# Altium PCB ESP32C3-DevBoard.PcbDoc
Units mm, origin at the board's own origin, x right, y up, seen from the top; angles counter-clockwise.
Board outline 22.86 x 30.48 mm, 4 copper layers (Top Layer, Int1 (GND), Int2 (PWR), Bottom Layer), stack 1.575 mm thick; 41 components, 31 nets, 173 pads, 64 vias.
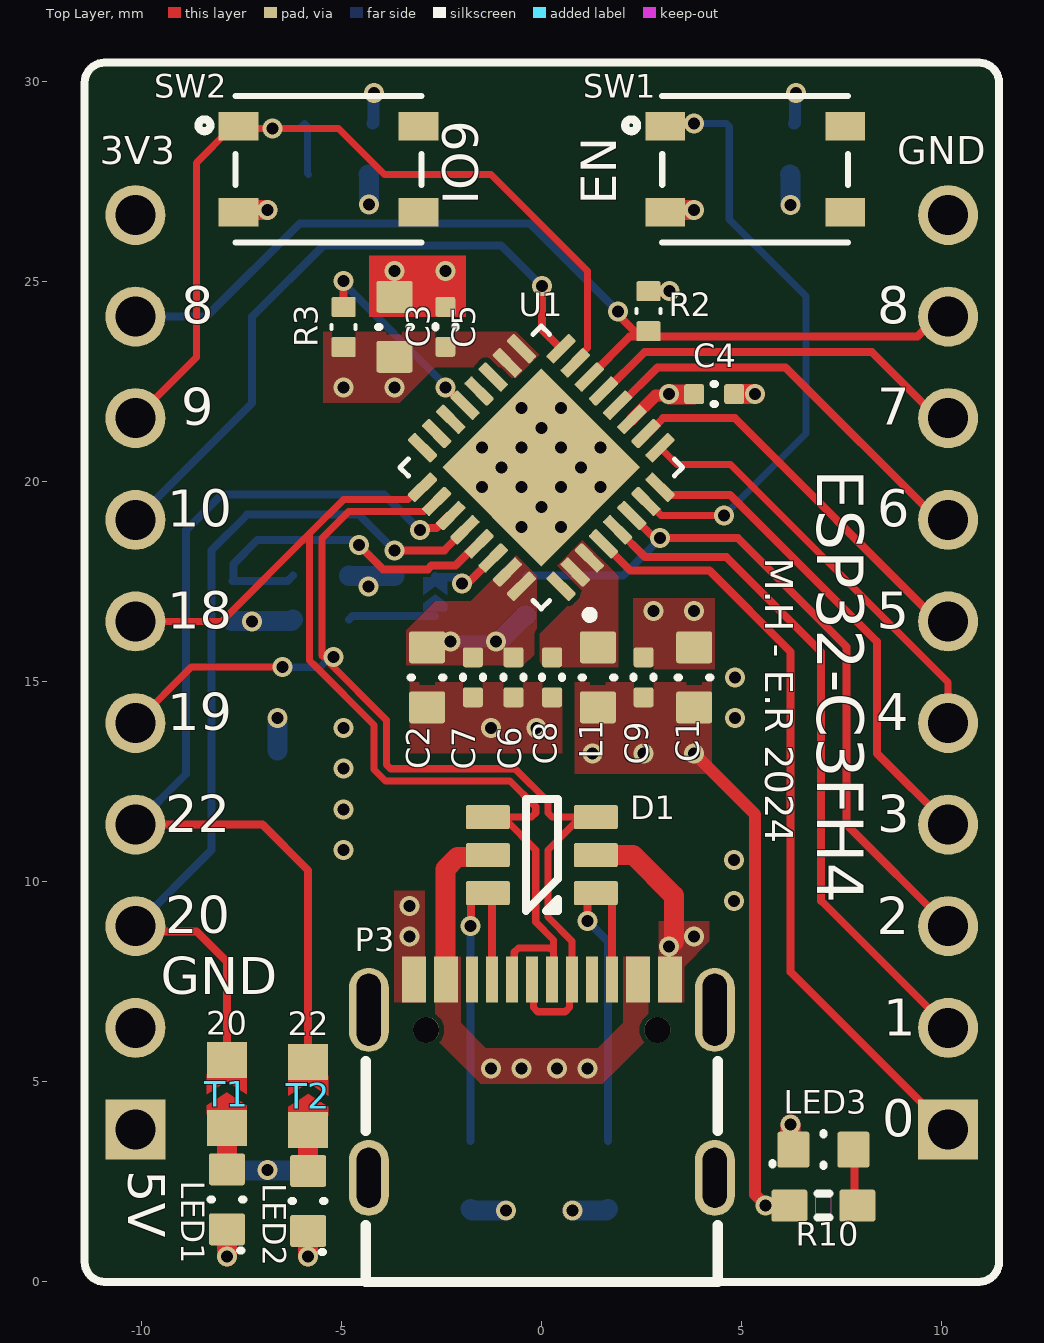
[diagram p0: Top Layer view]
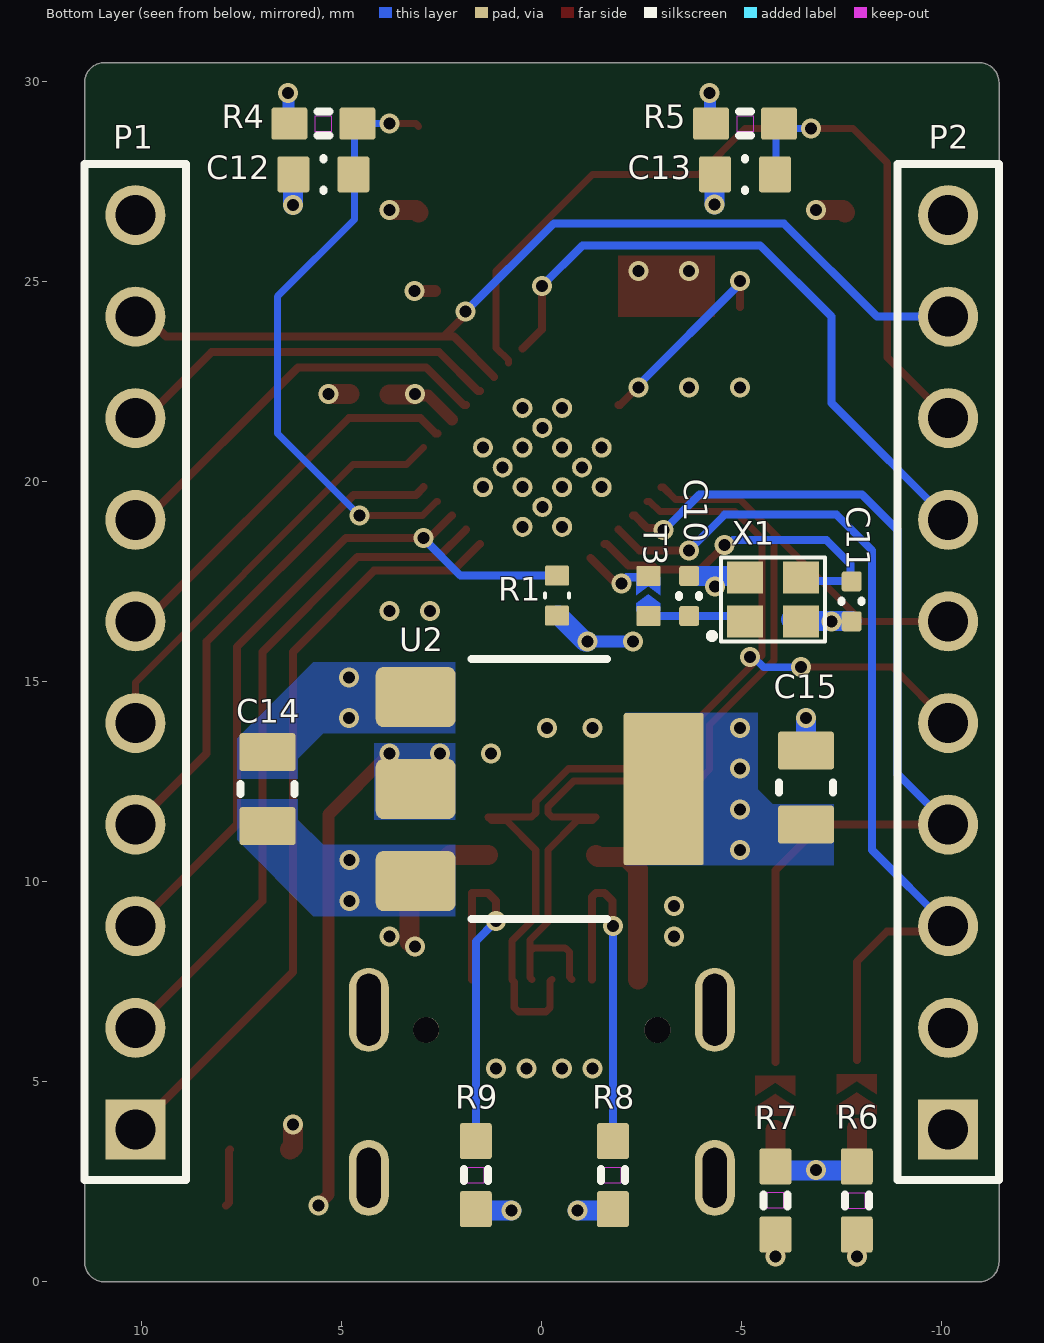
[diagram p1: Bottom Layer view, seen from below]
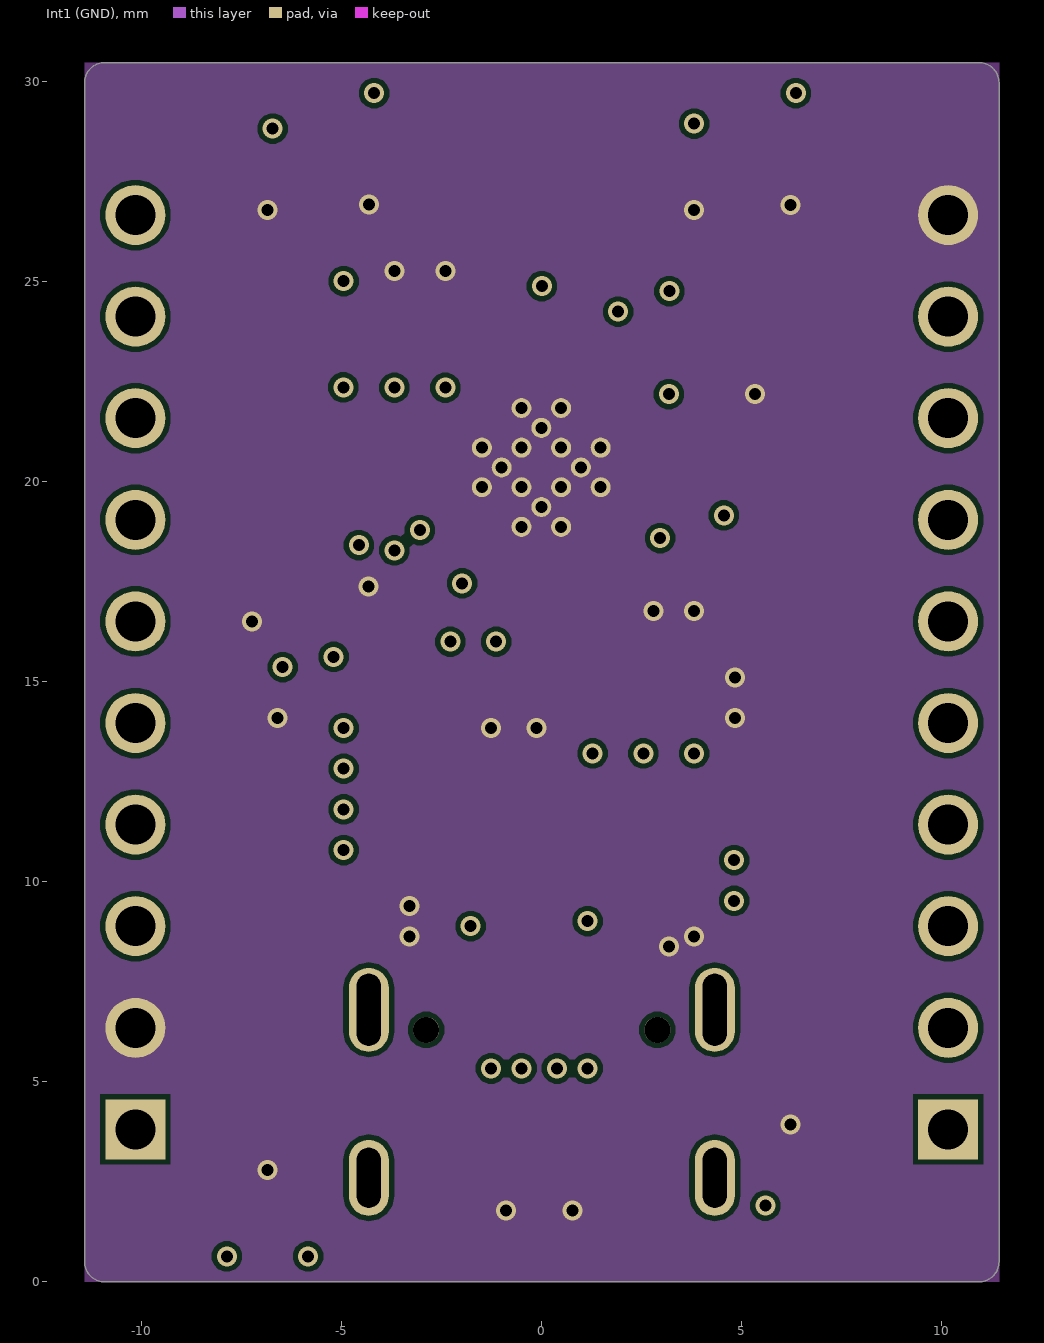
[diagram p2: Int1 (GND)]
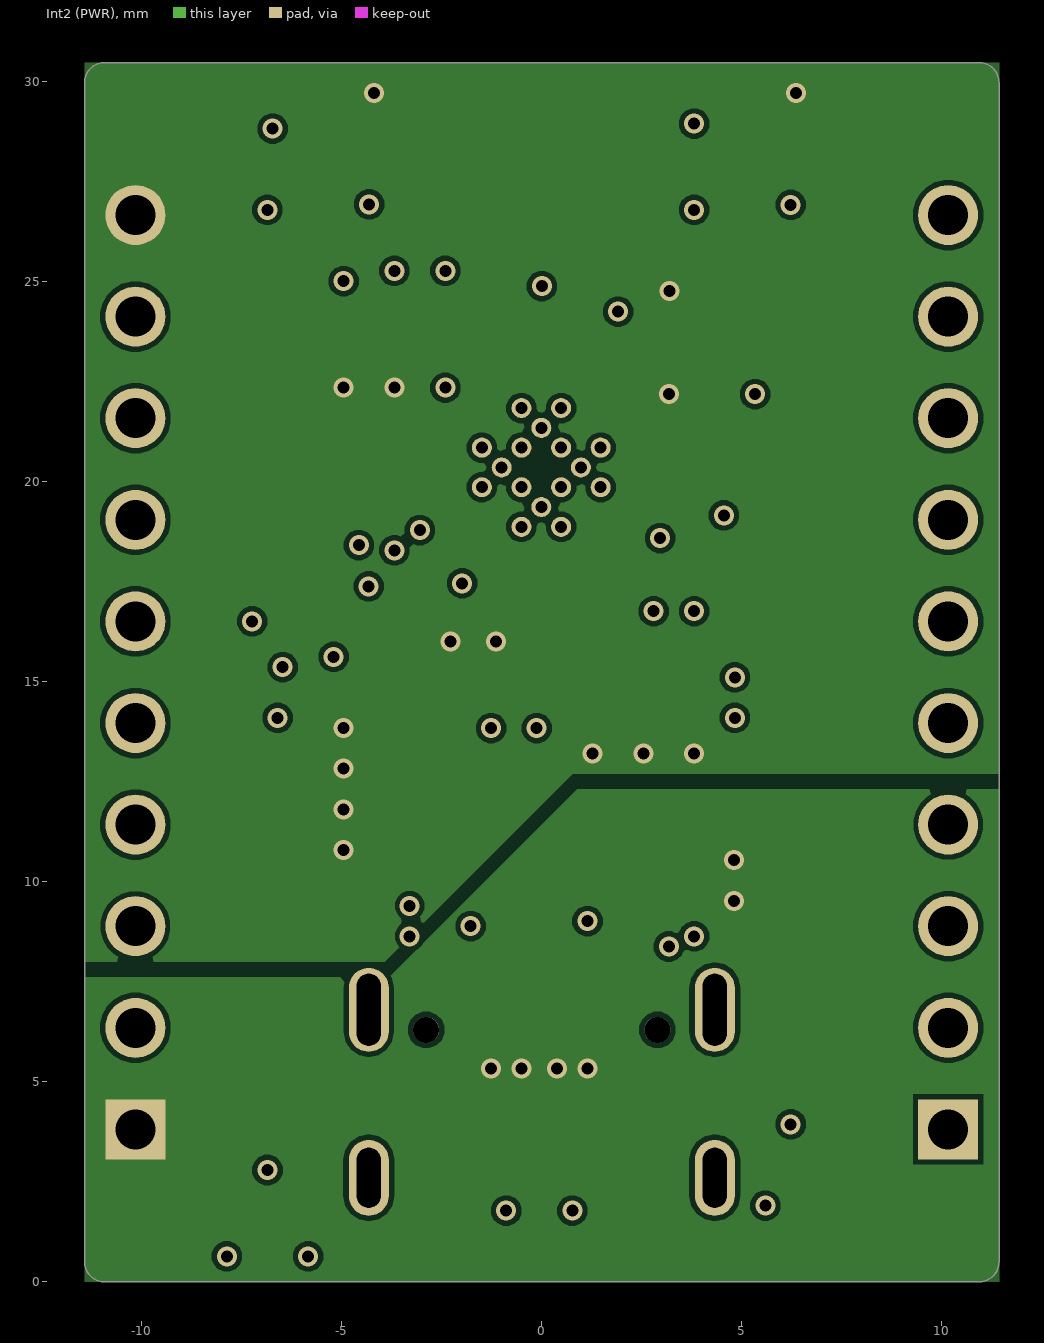
[diagram p3: Int2 (PWR)]

## Layer stack, top to bottom
Top Solder: solder mask 0.035, SM-001, Dk 4
Top Layer: signal copper 0.035
Dielectric 2: prepreg 0.2, PP-017, Dk 4.6
Int1 (GND): signal copper 0.015
Dielectric 3: core 1.065, Core-039, Dk 4.6
Int2 (PWR): signal copper 0.015
Dielectric 4: prepreg 0.21, PP-017, Dk 4.6
Bottom Layer: signal copper 0.035
Bottom Solder: solder mask 0.035, SM-001, Dk 4

## Board outline
-11.43,0.5 -11.43,29.98 cw(c-10.93,29.98) -10.93,30.48 10.93,30.48 cw(c10.93,29.98) 11.43,29.98 11.43,0.5 cw(c10.93,0.5) 10.93,0 -10.93,0 cw(c-10.93,0.5)

## Design rules (kind name [scope] priority, off if disabled: settings)
Clearance Clearance_Power [InNetClass('Power')] p1: gap=0.127 ignorepadtopadclearanceinfootprint=FALSE
Clearance Clearance_signal [All] p2: gap=0.125 ignorepadtopadclearanceinfootprint=FALSE
ComponentClearance [All] p1 off: gap=0.254 collisioncheckmode=3 verticalgap=0.254 showdistances=FALSE
DiffPairsRouting [InDifferentialPairClass('USB')] p1: maxlimit=0.254 minlimit=0.127 mostfreqgap=0.254 toplayer_maxgap=0.127 toplayer_prefgap=0.127 toplayer_minwidth=0.176 toplayer_maxwidth=0.176 toplayer_prefwidth=0.176 bottomlayer_maxgap=0.127 bottomlayer_prefgap=0.127 bottomlayer_minwidth=0.182 bottomlayer_maxwidth=0.182 bottomlayer_prefwidth=0.182 impedanceprofiledriven=TRUE impedanceprofileid={FA6609CF-BA32-4F74-B84B-CE5609EF71AF} impedanceprofilevalue=90.000000 maxuncoupledlength=12.7
HoleSize [All] p1 off: absolutevalues=TRUE maxlimit=2.54 minlimit=0.025 maxpercent=80.000 minpercent=20.000
MinimumSolderMaskSliver [All] p1 off: minsoldermaskwidth=0.254
PasteMaskExpansion [All] p1 off: expansion=0
PolygonConnect PolygonConnect_Power [InNetClass('Power')] p1: connectstyle=Direct reliefconductorwidth=0.254 reliefentries=4 polygonreliefangle="90 Angle" airgapwidth=0.254
PolygonConnect [All] p2: connectstyle=Direct reliefconductorwidth=0.254 reliefentries=4 polygonreliefangle="90 Angle" airgapwidth=0.254
RoutingVias [All] p1: holewidth=0.3 width=0.5 viastyle="Through Hole" minholewidth=0.15 minwidth=0.25 maxholewidth=1 maxwidth=1.3
SilkToSolderMaskClearance [IsPad] p1 off: minsilkscreentomaskgap=0.254 clearancetoexposedcopper=TRUE
SolderMaskExpansion [ViaSize_TopLayer] p1 off: expansion=0.15 istentingtop=TRUE useseparateexpansions=TRUE expansionbottom=0.15 istentingbottom=TRUE
Width Width_Power(5A) [InNetClass('Power')] p1: maxlimit=2 minlimit=0.5 preferedwidth=1.25 minimp=50.000000 maximp=50.000000 favimp=50.000000
Width Width_signal [All] p2: maxlimit=1 minlimit=0.1 preferedwidth=0.2 minimp=50.000000 maximp=50.000000 favimp=50.000000
24 further rules are at their usual default settings.

## Classes and differential pairs
differential pair class USB: USB
net class Power: VBUS
differential pair USB: +USB_P -USB_N

## Components (designator, comment, footprint, x,y, rotation, side; value= is the part's Value field where it differs from the comment)
C1 "Capacitor-0603-10uF-6.3V-X5R" CAPACITOR-0603 3.81,15.113 r270 top value=10uF
C2 "Capacitor-0603-10uF-6.3V-X5R" CAPACITOR-0603 -2.867,15.113 r90 top value=10uF
C3 "Capacitor-0603-10uF-6.3V-X5R" CAPACITOR-0603 -3.683,23.876 r270 top value=10uF
C4 "Capacitor-0402-0.1uF-25V-X5R" CAPACITOR-0402 4.31,22.193 r180 top value=0.1uF
C5 "Capacitor-0402-0.1uF-25V-X5R" CAPACITOR-0402 -2.413,23.876 r270 top value=0.1uF
C6 "Capacitor-0402-0.1uF-25V-X5R" CAPACITOR-0402 -0.708,15.113 r90 top value=0.1uF
C7 "Capacitor-0402-10nF-25V-X7R" CAPACITOR-0402 -1.724,15.113 r90 top value=10nF
C8 "Capacitor-0402-0.1uF-25V-X5R" CAPACITOR-0402 0.258,15.113 r90 top value=0.1uF
C9 "Capacitor-0402-0.1uF-25V-X5R" CAPACITOR-0402 2.544,15.113 r270 top value=0.1uF
C10 "Capacitor-0402-10pF-50V-C0G" CAPACITOR-0402 -3.683,17.145 r270 bottom value=10pF
C11 "Capacitor-0402-10pF-50V-C0G" CAPACITOR-0402 -7.747,17.01 r90 bottom value=10pF
C12 "Capacitor-0603-1uF-25V-X5R" CAPACITOR-0603 5.461,27.686 r180 bottom value=1uF
C13 "Capacitor-0603-1uF-25V-X5R" CAPACITOR-0603 -5.08,27.686 r180 bottom value=1uF
C14 "Capacitor-0805-22uF-16V-X5R" CAPACITOR-0805 6.858,12.319 r270 bottom value=22uF
C15 "Capacitor-0805-22uF-16V-X5R" CAPACITOR-0805 -6.604,12.355 r270 bottom value=22uF
D1 "NUP4301MR6T1G" SOT-23-6 0,10.668 r90 top
L1 "2506036007Y3" CAPACITOR-0603 1.401,15.113 r270 top value=60R@100MHz
LED1 "B1911USD-20D000114U1930" LED-0603-2PIN -7.874,2.063 r90 top
LED2 "B1911USD-20D000114U1930" LED-0603-2PIN -5.842,2.021 r90 top
LED3 "B1911USD-20D000114U1930" LED-0603-2PIN 7.039,3.302 r0 top
P1 "10pos-TH-2.54mm" HDR1X10 10.16,15.24 r90 bottom
P2 "10pos-TH-2.54mm" HDR1X10 -10.16,15.24 r90 bottom
P3 "USB-C" USB-C 0,5.08 r0 top
R1 "SMT resistor" Resistor-0402 -0.381,17.153 r90 bottom value=10k
R2 "SMT resistor" Resistor-0402 2.667,24.265 r270 top value=10k
R3 "SMT resistor" Resistor-0402 -4.953,23.868 r270 top value=10k
R4 "SMT resistor" Resistor-0603 5.461,28.956 r0 bottom value=10k
R5 "SMT resistor" Resistor-0603 -5.08,28.956 r0 bottom value=10k
R6 "SMT resistor" Resistor-0603 -7.874,2.032 r90 bottom value=1k
R7 "SMT resistor" Resistor-0603 -5.842,2.032 r90 bottom value=1k
R8 "SMT resistor" Resistor-0603 -1.778,2.667 r90 bottom value=5.1k
R9 "SMT resistor" Resistor-0603 1.651,2.667 r90 bottom value=5.1k
R10 "SMT resistor" Resistor-0603 7.039,1.905 r180 top value=1k
SW1 "PTS815 SJM 250 SMTR LFS" "SW4_PTS815 SJM 250 SMTR LFS_CNK" 5.334,27.813 r90 top
SW2 "PTS815 SJM 250 SMTR LFS" "SW4_PTS815 SJM 250 SMTR LFS_CNK" -5.334,27.813 r90 top
T1 "NetTie_0603_Short" NetTie-0603-short -7.874,4.691 r270 top
T2 "NetTie_0603_Short" NetTie-0603-short -5.842,4.649 r270 top
T3 "NetTie_0402" NetTie-0402 -2.667,17.145 r90 bottom
U1 "ESP32-C3FH4-SOC" "VQFN-32-Exposed Pad" -0.013,20.359 r135 top locked
U2 "NCP1117ST15T3G" SOT-223-3/TO-261-3S 3.152,12.319 r270 bottom
X1 "CX2016DB40000D0FLJCC" 4-SMD -5.077,17.61 r180 bottom

## Footprints (in the part's own frame and the unit in brackets; to place one, negate y for a bottom-side part, rotate by r counter-clockwise, add the part's x,y. Pads: shape width x height; smd on the part's side, far side on the other; paste and mask are expansions set on the pad)
4-SMD [mm]
  rect 0.9x0.8 smd: 1(0,-1.1) 2(1.4,-1.1) 3(1.4,0) 4(0,0)
  silkscreen extent -0.87,-1.6 2,0.5
CAPACITOR-0402 [mm] "Metric 1005, EIA 0402. Per Yageo Product Specification V2.6"
  rrect25% 0.5x0.5 smd: 1(-0.5,0) 2(0.5,0)
  Top Layer pour cut-out: -0.3,0.25 0.3,0.25 0.3,-0.25 -0.3,-0.25
  silkscreen extent -0.02,-0.25 0.02,0.25, body extent -0.5,-0.27 0.5,0.28, height 0.51
CAPACITOR-0603 [mm] "Metric 1608, EIA 0603. Per Yageo Product Specification V2.2"
  rrect15% 0.8x0.9 smd: 1(-0.75,0) 2(0.75,0)
  Top Layer pour cut-out: -0.2,0.2 0.2,0.2 0.2,-0.2 -0.2,-0.2
  silkscreen extent 0,-0.41 0,0.41, body extent -0.93,-0.41 0.93,0.41, height 0.81
CAPACITOR-0805 [mm] "Metric 2012, EIA 0805, Per Yageo Product Specification V2.2"
  rrect15% 0.95x1.4 smd: 1(-0.925,0) 2(0.925,0)
  silkscreen extent -0.13,-0.67 0.13,0.67, body extent -1.09,-0.64 1.09,0.64, height 1.26
HDR1X10 [mm] "Connector; Header; 2 Position"
  rect 1.5x1.5 hole 1: 1(-11.43,0)
  round 1.5 hole 1: 2(-8.89,0) 3(-6.35,0) 4(-3.81,0) 5(-1.27,0) 6(1.27,0) 7(3.81,0) 8(6.35,0) 9(8.89,0) 10(11.43,0)
  silkscreen extent -12.7,-1.27 12.7,1.27, body extent -12.7,-1.27 12.7,1.27, height 8.54
LED-0603-2PIN [mm] "Metric 1608, EIA 0603. Per Yageo Product Specification V2.2"
  rrect15% 0.8x0.9 smd: 1(-0.75,0) 2(0.75,0)
  Top Layer pour cut-out: -0.35,0.45 0.35,0.45 0.35,-0.45 -0.35,-0.45
  silkscreen extent -1.28,-0.41 0,0.41, body extent -0.93,-0.41 0.93,0.41, height 0.81
NetTie-0402 [mm] "Metric 1005, EIA 0402 Drawn per Yageo \"Chip resistors Mounting\" rev 10"
  rrect15% 0.5x0.6 smd: 1(-0.5,0) 2(0.5,0)
  Top Layer region: -0.375,0.3 -0.175,0.3 0.05,0 -0.175,-0.3 -0.375,-0.3
  Top Layer region: 0.475,0.3 0.025,0.3 0.25,0 0.025,-0.3 0.375,-0.3 0.475,-0.3
  body extent -0.51,-0.25 0.51,0.25, height 0.51
NetTie-0603-short [mm] "Net Tie with an EIA 0603 land pattern"
  rect 0.9x1 smd paste-1 mask+0.102: 1(-0.85,0) 2(0.85,0)
  Top Layer region: -0.5,0.5 0,0.5 -0.125,0.3 -0.325,0 -0.125,-0.3 0,-0.5 -0.5,-0.5
  Top Layer region: 0.5,0.5 0.275,0.5 0.15,0.3 -0.05,0 0.15,-0.3 0.275,-0.5 0.5,-0.5
Resistor-0402 [mm] "Metric 1005, EIA 0402 Drawn per Yageo \"Chip resistors Mounting\" rev 10"
  rrect15% 0.5x0.6 smd: 1(-0.5,0) 2(0.5,0)
  Top Layer pour cut-out: -0.25,0.3 0.25,0.3 0.25,-0.3 -0.25,-0.3
  silkscreen extent -0.05,-0.3 0.05,0.3, body extent -0.51,-0.25 0.51,0.25, height 0.51
Resistor-0603 [mm] "Metric 1608, EIA 0603 Drawn per Yageo \"Chip resistors Mounting\" rev 10"
  rrect15% 0.9x0.8 smd: 1(-0.85,0) 2(0.85,0)
  Top Layer pour cut-out: -0.2,0.2 0.2,0.2 0.2,-0.2 -0.2,-0.2
  Top Layer keep-out region: -0.2,0.2 0.2,0.2 0.2,-0.2 -0.2,-0.2
  silkscreen extent -0.15,-0.3 0.15,0.3, body extent -0.8,-0.4 0.8,0.4, height 0.55
SOT-23-6 [mm] "SOT23-6, from TI DDC (R-PDSO-G6)"
  rrect15% 0.6x1.1 smd: 1(-0.95,-1.35) 2(0,-1.35) 3(0.95,-1.35) 4(0.95,1.35) 5(0,1.35) 6(-0.95,1.35)
  silkscreen extent -1.4,-0.4 1.4,0.4, body extent -1.5,-1.37 1.5,1.38, height 1.1
SOT-223-3/TO-261-3S [mm] "TO-261-3 / SOT-223-3 from Infineon IPN80R600P7 Datasheet, rev 2,1"
  rrect25% 1.5x2 smd: 1(-2.3,0) 2(0,0) 3(2.3,0)
  rrect5% 3.8x2 smd: 4(0,6.2)
  silkscreen extent -3.25,1.4 3.25,4.78, body extent -3.25,-0.37 3.25,6.57, height 1.64
"SW4_PTS815 SJM 250 SMTR LFS_CNK" [mm]
  rect 0.711x0.991 smd paste+0: 1(1.075,2.25) 2(1.075,-2.25) 3(-1.075,2.25) 4(-1.075,-2.25)
  silkscreen extent -1.83,-2.32 1.83,3.25, body extent -1.83,-2.32 1.83,2.32, height 3
USB-C [mm]
  oval 1x1.9 hole 0.6 slot 1.5 at 90 deg: 13(-4.325,-2.481) 13(4.325,-2.481)
  oval 1x2.1 hole 0.6 slot 1.8 at 90 deg: 13(-4.325,1.719) 13(4.325,1.719)
  rect 0.6x1.15 smd mask+0.08: A1B12(-3.2,2.481) A4B9(-2.4,2.481) B1A12(3.2,2.481) B4A9(2.4,2.481)
  rect 0.3x1.15 smd mask+0.08: A5(-1.25,2.481) A6(-0.25,2.481) A7(0.25,2.481) A8(1.25,2.481) B5(1.75,2.481) B6(0.75,2.481) B7(-0.75,2.481) B8(-1.75,2.481)
  round 0.65 hole 0.65 unplated: ""(-2.89,1.219) ""(2.89,1.219)
  silkscreen extent -4.4,-5.08 4.4,0.44, body extent -4.47,-5.08 4.47,2.52, height 3.28
"VQFN-32-Exposed Pad" [mm]
  rrect25% 0.81x0.27 smd: 1(-2.45,1.75) 2(-2.45,1.25) 3(-2.45,0.75) 4(-2.45,0.25) 5(-2.45,-0.25) 6(-2.45,-0.75) 7(-2.45,-1.25) 8(-2.45,-1.75) 17(2.45,-1.75) 18(2.45,-1.25) 19(2.45,-0.75) 20(2.45,-0.25) 21(2.45,0.25) 22(2.45,0.75) 23(2.45,1.25) 24(2.45,1.75)
  rrect25% 0.27x0.81 smd: 9(-1.75,-2.45) 10(-1.25,-2.45) 11(-0.75,-2.45) 12(-0.25,-2.45) 13(0.25,-2.45) 14(0.75,-2.45) 15(1.25,-2.45) 16(1.75,-2.45) 25(1.75,2.45) 26(1.25,2.45) 27(0.75,2.45) 28(0.25,2.45) 29(-0.25,2.45) 30(-0.75,2.45) 31(-1.25,2.45) 32(-1.75,2.45)
  round 0.5 hole 0.3 mask+0: 33(-1.4,0.7) 33(-1.4,-0.7) 33(-0.7,0.7) 33(-0.7,-0.7) 33(-0.7,1.4) 33(-0.7,-1.4) 33(-0.7,0) 33(0,0.7) 33(0,-0.7) 33(0.7,-1.4) 33(0.7,0) 33(0.7,1.4) 33(0.7,0.7) 33(0.7,-0.7) 33(1.4,-0.7) 33(1.4,0.7)
  rect 3.5x3.5 smd paste-1.4: 33(0,0)
  silkscreen extent -3.56,-2.5 2.5,2.5, body extent -2.5,-2.5 2.5,2.5, height 0.9

## Part data
C1 C2 C3: "Capacitor-0603-10uF-6.3V-X5R, Low ESR, Low ESL", Package / Case="Metric 1608 , EIA 0603", Supplier Part Number 1=NMC0603X5R106M6.3TRP4KF, Volt=6.3V, Mounted=Yes, Precision=X5R-20%, Supplier 1="Arrow Electronics"
C4 C5 C6 C8 C9: Package / Case="0402 (1005 Metric)", Supplier Part Number 1=1276-1043-1-ND, Volt=25V, Mounted=Yes, Precision="X7R - 10%", Supplier 1=Digi-Key, Supplier 2=Digi-Key
C7: Package / Case="0402 (1005 Metric)", Supplier Part Number 1=490-1312-1-ND, Volt=25V, Mounted=Yes, Precision="X7R - 10%", Supplier 1=Digi-Key, Supplier 2=Digi-Key
C10 C11: Package / Case="0402 (1005 Metric)", Supplier Part Number 1=399-C0402C100K5GAC7867CT-ND, Volt=50V, HelpURL=https://connect.kemet.com:7667/gateway/IntelliData-ComponentDocumentation/1.0/download/datasheet/C0402C100K5GACTU, Mounted=Yes, Precision="C0G - 10%", Supplier 1=Digi-Key, Supplier 2=Digi-Key
C12 C13: Package / Case="Metric 1608, EIA 0603", Supplier Part Number 1=1276-1859-2-ND, Volt=25V, Mounted=Yes, Precision=X5R-10%, Supplier 1=Digi-Key, Supplier 2=Digi-Key, Supplier Part Number 2=1276-1942-2-ND
C14 C15: Package / Case="Metric 2012 , EIA 0805", Supplier Part Number 1=1276-6780-1-ND, Volt=16V, Mounted=Yes, Precision=X5R-10%, Supplier 1=Digi-Key, Supplier 2=Digi-Key, Supplier 3=Digi-Key, Supplier 4=Digi-Key
D1: "4CH Clamp Ipp Tvs Diode Surface Mount SOT23-6 (SC74)", Package / Case=SOT23-6, Supplier Part Number 1=NUP4301MR6T1GOSTR-ND, Volt=70, Mounted=Yes, Supplier 1=Digi-Key
L1: "60 Ohms @ 100 MHz 1 Signal Line Ferrite Bead 0603 (1608 Metric) 3A 40mOhm", Current=3A, Package / Case=SMD, Supplier Part Number 1=1934-1396-1-ND, Mounted=Yes, Supplier 1=Digi-Key
LED1 LED2 LED3: "LED RED CLEAR 1608 SMD", Package / Case="0603 (1608 Metric)", Supplier Part Number 1=3147-B1911USD-20D000114U1930CT-ND, Mounted=Yes, Supplier 1=Digi-Key
P1 P2: "10pos TH 2.54mm Header", Package / Case=TH, Supplier Part Number 1=N/A, Mounted=Yes, Supplier 1=Digi-Key, Volt=N/A
P3: "TYPEC-304J-BCP16 / 5A USB 3.1 1 Type-C SMD USB Connectors", Package / Case=SMD, Supplier Part Number 1=TYPEC-304J-BCP16, Volt=N/A, Mounted=Yes, Supplier 1=LCSC
R1 R2 R3: library part Resistor-0402-10k, "Resistor-0402-10k", Package / Case="Metric 1005, EIA 0402", Supplier Part Number 1=311-10.0KLRCT-ND, Mounted=Yes, Precision=1%, Supplier 1=Digi-Key, Watt=1/16W
R4 R5: library part Resistor0603-10k, "Resistor0603-10k", Package / Case="Metric 1608, EIA 0603", Supplier Part Number 1=311-10.0KHRTR-ND, Mounted=Yes, Precision=1%, Supplier 1=Digi-Key, Supplier 2=Digi-Key, Supplier 3=Digi-Key, Supplier 4=Digi-Key, Supplier Part Number 2=RMCF0603FT10K0TR-ND, Watt=0.1W
R6 R7 R10: library part Resistor-0603-1k, "Resistor0603-1k", Package / Case="Metric 1608, EIA 0603", Supplier Part Number 1=311-1.00KHRCT-ND, Mounted=Yes, Precision=1%, Supplier 1=Digi-Key, Watt=0.1W
R8 R9: library part Resistor-0603-5.1k, "Resistor-0603-5.1k", Package / Case="Metric 1608, EIA 0603", Supplier Part Number 1=311-5.10KHRCT-ND, Mounted=Yes, Precision=1%, Supplier 1=Digi-Key, Watt=0.1W
SW1 SW2: "TACT 4.2 X 3.2, 2.5 MM H, 180GF,", Current=0.05A, Supplier Part Number 1=CKN12215-1-ND, Volt=12V, Mounted=Yes, Supplier 1=Digi-Key
U1: "Bluetooth, WiFi 802.11b/g/n, Bluetooth v5.0 Transceiver Module 2.402GHz ~ 2.48GHz Antenna Not Included Surface Mount", Package="VFQFN-32 Espressif Systems", Supplier Part Number 1=1904-ESP32-C3FH4CT-ND, Availability="In Stock", DigiKey Link=https://www.digikey.ca/en/products/detail/espressif-systems/ESP32-C3FH4/14115592, HelpURL=https://www.espressif.com/sites/default/files/documentation/esp32-c3_datasheet_en.pdf, MF="Espressif Systems", MP=ESP32-C3FH4, Supplier 1=Digikey
U2: "IC REG LINEAR 3.3V 1A SOT223", Package / Case=SOT223, Supplier Part Number 1=NCV1117ST33T3GOSCT-ND, Mounted=Yes, Supplier 1=Digi-Key
X1: "40 MHz ±10ppm Crystal 8pF 50 Ohms 4-SMD, No Lead", Supplier Part Number 1=478-CX2016DB40000D0FLJCCCT-ND, Supplier 1=Digikey

## Via types
v1: diameter 0.5, hole 0.3, Top Layer to Bottom Layer, tented both sides, 64 vias

## Nets (pads, with @x,y where several pads share a name; then routed paths per layer and width w, separated by ;. In a path a pad name is that pad's centre, name@x,y a point inside that pad or via, vN(x,y) a via of type N, cw(c..) or ccw(c..) an arc to the next point about the centre after c; other vN are vias at no path point)
3V3: C1.2 C2.2 C3.2 C4.2 C5.2 C6.2 C7.2 C9.2 C15.2 L1.2 P2.10 R1.1 R2.1 R3.2 R4.2 R5.2 R10.2 U1.11 U1.17 U1.18 U1.31 U1.32 U2.2 U2.4 | length 18.1
  Top Layer w0.3: U1.11 2.843,22.155 3.137,22.155 v1(3.175,22.193) ; R2.1 3.185,24.765 v1(3.187,24.768) ; v1(3.81,13.208) 5.334,11.684 5.334,2.181 5.588,1.927 v1(5.588,1.905)
  Top Layer w0.5: v1(3.175,22.193) 3.183,22.185 C4.2@3.81,22.185
  Bottom Layer w0.3: R5.2 -4.21,28.975 -4.21,29.699 v1(-4.191,29.718) ; v1(-2.286,16.002) v1(-1.143,16.002) ; R4.2 6.331,28.975 6.331,29.699 v1(6.35,29.718)
  Bottom Layer w0.5: v1(-1.143,16.002) -1.082,16.002 -0.431,16.653 R1.1
  other v1: -4.953,10.795 -4.953,11.811 -4.953,12.827 1.27,13.208 2.54,13.208 -4.953,13.843 -4.961,22.36 -3.683,22.352
CC1: D1.6 P3.A5 R8.2 | length 8.7
  Top Layer w0.2: v1(-1.778,8.89) -1.767,8.901 -1.767,9.518 -1.567,9.718 D1.6 -1.25,9.618 P3.A5
  Bottom Layer w0.2: R8.2 v1(-1.778,8.89)
CC2: D1.1 P3.B5 R9.2 | length 9.1
  Top Layer w0.2: v1(1.143,9.017) 1.143,9.518 1.343,9.718 D1.1 1.75,9.718 P3.B5
  Bottom Layer w0.2: v1(1.143,9.017) 1.651,8.509 R9.2
EN: C12.2 R4.1 SW1.1 U1.7 | length 15.1
  Top Layer w0.176: U1.7 2.634,19.511 2.986,19.159 v1(4.554,19.159) ; SW1.1 3.152,28.956 v1(3.81,28.956)
  Bottom Layer w0.176: v1(3.81,28.956) R4.1 4.686,28.881 4.686,26.556 6.604,24.638 6.604,21.209 v1(4.554,19.159)
GND: C1.1 C2.1 C3.1 C4.1 C5.1 C6.1 C7.1 C8.1 C9.1 C10.1 C11.1 C12.1 C13.1 C14.1 C15.1 D1.2 LED3.1 P1.10 P2.2 P3.A1B12 P3.B1A12 R6.2 R7.2 R8.1 R9.1 SW1.3 SW2.3 U1.33 U2.1 X1.2 X1.4 | length 15.3
  Top Layer w0.5: SW2.3 -7.525,26.797 v1(-6.858,26.797) ; D1.2 2.286,10.668 3.302,9.652 3.302,8.509 v1(3.175,8.382) ; SW1.3 3.143,26.797 v1(3.81,26.797) ; C4.1 v1(5.334,22.193) ; v1(6.223,3.937) 6.223,3.368 LED3.1
  Bottom Layer w0.5: R6.2 -7.778,2.787 -6.865,2.787 v1(-6.858,2.794) ; C11.1@-7.747,16.518 -6.261,16.518 X1.2@-6.226,16.553 ; v1@-6.847,2.783 -5.941,2.783 R7.2 ; C15.1 v1(-6.604,14.097) ; X1.4@-4.826,17.653 -4.818,17.645 C10.1 ; C13.1 -4.318,27.674 v1(-4.318,26.936) ; R8.1 -1.739,1.778 v1(-0.889,1.778) ; v1(0.762,1.778) 1.612,1.778 R9.1 ; C12.1 6.223,27.674 v1(6.223,26.924)
  other v1: -3.302,8.636 3.81,8.636 -3.302,9.398 -1.27,13.843 -0.127,13.843 4.826,14.097 4.826,15.113 -7.239,16.51 2.794,16.764 3.81,16.764 -4.327,17.383 -3.683,25.273 -2.413,25.273
IO0: P1.1 U1.4 | length 19.4
  Top Layer w0.2: U1.4 2.212,17.78 4.191,17.78 6.223,15.748 6.223,7.747 P1.1
IO1: P1.2 U1.5 | length 17.1
  Top Layer w0.2: U1.5 2.579,18.12 4.613,18.12 6.985,15.748 6.985,9.525 P1.2
IO2: P1.3 R1.2 U1.6 | length 18.5
  Top Layer w0.2: U1.6 2.754,18.653 2.902,18.653 v1(2.959,18.595) 4.9,18.595 7.62,15.875 7.62,11.43 P1.3
  Bottom Layer w0.2: R1.2 2.032,17.653 2.959,18.58 v1(2.959,18.595)
IO3: P1.4 U1.8 | length 12.3
  Top Layer w0.2: U1.8 3.148,19.673 4.711,19.673 8.382,16.002 8.382,13.208 P1.4
IO4: P1.5 U1.9 | length 10.6
  Top Layer w0.176: U1.9 3.382,20.428 4.718,20.428 10.16,14.986 P1.5
IO5: P1.6 U1.10 | length 9.8
  Top Layer w0.2: U1.10 2.653,21.208 3.035,21.59 4.826,21.59 9.906,16.51 P1.6
IO6: P1.7 U1.12 | length 10.2
  Top Layer w0.2: U1.12 1.946,21.915 2.891,22.86 6.096,22.86 9.906,19.05 P1.7
IO7: P1.8 U1.13 | length 9.7
  Top Layer w0.2: U1.13 1.592,22.268 2.565,23.241 8.255,23.241 9.906,21.59 P1.8
IO8: P1.9 P2.9 R2.2 U1.14 | length 24.4
  Top Layer w0.2: U1.14 2.197,23.63 R2.2@2.413,23.63 ; v1(1.905,24.257) 1.905,24.176 2.413,23.668 R2.2@2.413,23.63 ; P1.9 9.893,24.13 9.393,23.63 2.667,23.63 R2.2@2.413,23.63
  Bottom Layer w0.2: P2.9 -8.382,24.13 -6.051,26.461 -0.299,26.461 v1(1.905,24.257)
IO9: C13.2 P2.8 R5.1 SW2.1 U1.15 | length 23.2
  Top Layer w0.176: P2.8 -8.636,23.114 -8.636,27.976 -7.783,28.829 v1(-6.731,28.829) -5.08,28.829 -3.937,27.686 -1.27,27.686 1.143,25.273 1.143,23.349 0.836,23.042 U1.15
  Bottom Layer w0.176: v1(-6.731,28.829) -6.057,28.829 R5.1 -5.855,28.881 -5.855,27.711 C13.2
IO10: P2.7 U1.16 | length 16.4
  Top Layer w0.2: v1(0,24.892) 0,23.811 U1.16
  Bottom Layer w0.2: P2.7 -7.239,21.971 -7.239,24.13 -5.461,25.908 -1.016,25.908 v1(0,24.892)
IO20: P2.3 T1.1 U1.28 | length 22.6
  Top Layer w0.2: P2.3 -10.033,8.763 -8.636,8.763 -7.874,8.001 T1.1 ; v1(-3.683,18.288) -2.438,18.288 U1.28
  Bottom Layer w0.2: P2.3 -8.255,10.795 -8.255,18.288 -7.366,19.177 -4.572,19.177 v1(-3.683,18.288)
IO22: P2.4 T2.1 U1.27 | length 25
  Top Layer w0.2: P2.4 -6.985,11.43 -5.842,10.287 T2.1 ; v1(-3.048,18.791) -2.991,18.849 -2.634,18.849 -2.325,19.157 U1.27
  Bottom Layer w0.2: P2.4 -8.89,12.7 -8.89,18.796 -8.001,19.685 -3.942,19.685 v1(-3.048,18.791)
NetC8_2: C8.2 L1.1 U1.2 U1.3
NetC10_2: C10.2 T3.1 X1.1 | length 2.2
  Bottom Layer w0.2: X1.1@-4.826,16.553 -4.734,16.645 -3.556,16.645 T3.1
NetC11_2: C11.2 U1.29 X1.3 | length 9
  Top Layer w0.2: v1(-4.572,18.415) -3.97,17.813 -2.851,17.813 -2.757,17.907 -2.161,17.907 -1.618,18.45 U1.29
  Bottom Layer w0.2: X1.3@-6.226,17.653 -6.361,17.518 -7.737,17.518 -7.711,17.544 -7.711,17.943 -7.112,18.542 -4.78,18.542 -4.653,18.415 v1(-4.572,18.415)
NetLED1_1: LED1.1 R6.1 | length 0.7
  Top Layer w0.5: v1(-7.874,0.635) LED1.1
NetLED1_2: LED1.2 T1.2 | length 1
  Top Layer w0.5: LED1.2 T1.2
NetLED2_1: LED2.1 R7.1 | length 0.6
  Top Layer w0.5: v1(-5.842,0.635) LED2.1
NetLED2_2: LED2.2 T2.2 | length 1
  Top Layer w0.5: LED2.2 T2.2
NetLED3_2: LED3.2 R10.1 | length 1.4
  Top Layer w0.2: LED3.2 7.814,3.277 7.814,1.98 R10.1
NetR3_1: R3.1 U1.21 | length 5
  Top Layer w0.2: R3.1 v1(-4.953,25.019) ; v1(-2.413,22.352) -2.386,22.352 -1.949,21.915 U1.21
  Bottom Layer w0.2: v1(-4.953,25.019) -4.953,24.956 -2.413,22.415 v1(-2.413,22.352)
NetT3_2: T3.2 U1.30 | length 1.8
  Top Layer w0.203: v1(-1.99,17.464) -1.933,17.521 -1.791,17.521 U1.30
  Bottom Layer w0.203: T3.2 -2.635,17.613 -2.119,17.613 -1.99,17.484 v1(-1.99,17.464)
USB_N: D1.4 P2.6 P3.A7 P3.B7 U1.25 | length 27.7
  Top Layer w0.176: P2.6 -8.001,16.51 -5.804,18.707 ; U1.25 -3.037,19.864 -3.343,19.558 -4.953,19.558 -5.804,18.707 ; P3.B7 -0.688,7.623 -0.688,8.246 -0.585,8.35 0.199,8.35 0.293,8.255 ; P3.A7 0.293,7.605 0.293,8.255 ; -5.804,18.707 -5.804,15.535 -5.676,15.406 -4.191,13.922 -4.191,12.805 -3.91,12.524 -0.797,12.524 -0.152,11.878 -0.152,11.721 -0.255,11.618 D1.4 -1.262,11.53 -0.887,11.53 -0.152,10.795 -0.152,8.994 0.293,8.548 0.293,8.255
USB_P: D1.3 P2.5 P3.A6 P3.B6 U1.26 | length 28.4
  Top Layer w0.176: P2.5 -8.763,15.367 v1(-6.477,15.367) ; -5.461,15.621 -5.5,15.66 -5.5,18.581 -4.827,19.255 -2.951,19.255 -2.695,19.511 U1.26 ; v1@-5.334,15.494 -3.888,14.048 -3.888,12.93 -3.784,12.827 -0.672,12.827 0.152,12.004 0.152,11.721 0.255,11.618 D1.3 1.262,11.53 0.887,11.53 0.152,10.795 0.152,9.119 0.75,8.521 P3.B6 0.688,7.5 0.688,6.855 0.585,6.752 -0.107,6.752 -0.21,6.855 -0.21,7.521 P3.A6
  Bottom Layer w0.182: v1(-6.477,15.367) -5.547,15.367 -5.293,15.621 v1(-5.207,15.621)
VBUS: C14.2 D1.5 P2.1 P3.A4B9 P3.B4A9 U2.3 | length 4
  Top Layer w0.5: P3.A4B9 -2.405,7.566 -2.405,10.325 -2.112,10.618 -1.4,10.618 D1.5
  other v1: -1.27,5.334 -0.508,5.334 0.381,5.334 1.143,5.334 4.807,9.525 4.807,10.541
pads on no net: P3. P3.13 P3.A8 P3.B8 SW1.2 SW1.4 SW2.2 SW2.4 U1.1 U1.19 U1.20 U1.22 U1.23 U1.24

## Polygon pours and split planes (outlines as drawn)
VBUS on Int2 (PWR) "VBUS_L03_P014" (solid, remove dead copper, pour order 14): 0.889,12.319 -3.81,7.62 -11.43,7.62 -11.43,0 11.43,0 11.43,12.319
3V3 on Int2 (PWR) "3V3_L03_P015" (solid, remove dead copper, pour order 15): -3.929,8.001 0.77,12.7 11.43,12.7 11.43,30.48 -11.43,30.48 -11.43,8.001
GND on Top Layer "GND_L01_P019" (solid, remove dead copper, pour order 19): 2.921,6.985 3.556,6.985 3.556,7.874 4.191,8.509 4.191,9.017 2.921,9.017
GND on Top Layer "GND_L01_P018" (solid, pour order 18): -2.921,6.985 -2.921,9.779 -3.683,9.779 -3.683,6.985
3V3 on Top Layer "3V3_L01_P013" (solid, remove dead copper, pour order 13): -2.667,22.86 -3.556,21.971 -5.461,21.971 -5.461,23.749 -0.635,23.749 -0.064,23.177 -0.699,22.542 -1.016,22.86
GND on Top Layer "GND_L01_P011" (solid, remove dead copper, pour order 11): 0.508,14.986 0.508,13.208 -3.302,13.208 -3.302,14.986
3V3 on Top Layer "3V3_L01_P010" (solid, remove dead copper, pour order 10): -0.635,18.161 -0.127,17.653 -0.127,15.744 -0.458,15.413 -3.393,15.413 -3.393,16.292 -2.667,17.018 -1.778,17.018
NetC8_2 on Top Layer "NETC8_2_L01_P009" (solid, remove dead copper, pour order 9): 0.381,17.907 1.016,18.542 1.905,17.653 1.905,15.367 -0.054,15.367 -0.054,16.202 1.016,17.272
GND on Top Layer "GND_L01_P008" (solid, remove dead copper, pour order 8): 4.318,17.091 4.318,15.313 2.286,15.313 2.286,17.091
3V3 on Top Layer "3V3_L01_P007" (solid, remove dead copper, pour order 7): 4.255,14.986 4.255,12.7 0.826,12.7 0.826,14.986
VBUS on Top Layer "VBUS_L01_P003" (solid, remove dead copper, pour order 3): -2.667,8.128 -2.667,6.096 -1.524,4.953 1.524,4.953 2.667,6.096 2.667,8.128 2.032,8.128 2.032,6.477 1.397,5.842 -1.397,5.842 -2.032,6.477 -2.032,8.128
3V3 on Bottom Layer "3V3_L04_P005" (solid, remove dead copper, pour order 5): -5.397,12.319 -5.778,11.938 -7.302,11.938 -7.302,10.414 -2.095,10.414 -2.095,14.224 -5.397,14.224
3V3 on Bottom Layer "3V3_L04_P017" (solid, pour order 17): 2.159,11.557 4.191,11.557 4.191,13.462 2.159,13.462
VBUS on Bottom Layer "VBUS_L04_P012" (solid, remove dead copper, pour order 12): 5.461,10.922 6.096,11.557 6.096,12.065 7.62,12.065 7.62,11.049 5.715,9.144 5.461,9.144 2.159,9.144 2.159,10.922
GND on Bottom Layer "GND_L04_P006" (solid, remove dead copper, pour order 6): 5.461,13.716 6.096,13.081 6.096,12.573 7.62,12.573 7.62,13.589 5.715,15.494 5.461,15.494 2.159,15.494 2.159,13.716
GND on Int1 (GND) "GND_L02_P016" (solid, remove dead copper, pour order 16): -11.43,0 11.43,0 11.43,30.48 -11.43,30.48

## Other copper
Top Layer:
  region net GND: -4.318,24.13 -1.905,24.13 -1.905,25.654 -4.318,25.654

## Silkscreen, mask and mechanical layers (free items; w line width, h text height)
Top Overlay:
  the board outline again, w0.2
  text "3V3" at -11.049,27.7 h1.2
  text "GND" at 8.89,27.699 h1.2
  text "IO9" at -1.286,26.924 h1.52 r90
  text "EN" at 2.159,26.924 h1.52 r90
  text "8" at -9.017,23.639 h1.6
  text "8" at 8.382,23.639 h1.6
  text "7" at 8.388,21.116 h1.6
  text "9" at -9.016,21.099 h1.6
  text "ESP32-C3FH4" at 6.5,20.32 h2 r270
  text "10" at -9.363,18.559 h1.6
  text "6" at 8.381,18.558 h1.6
  text "M.H - E.R 2024" at 5.347,18.1 h1.2 r270
  text "18" at -9.366,16.019 h1.6
  text "5" at 8.38,16.018 h1.6
  text "19" at -9.366,13.479 h1.6
  text "4" at 8.365,13.481 h1.6
  text "22" at -9.417,10.922 h1.6
  text "3" at 8.384,10.923 h1.6
  text "20" at -9.42,8.399 h1.6
  text "2" at 8.38,8.382 h1.6
  text "GND" at -9.525,6.875 h1.6
  text "20" at -8.383,5.98 h1
  text "22" at -6.351,5.969 h1
  text "1" at 8.531,5.842 h1.6
  text "0" at 8.509,3.319 h1.6
  text "5V" at -10.651,2.794 h1.6 r270